# Altium PCB PCB 3210105209 谌梓轩.PcbDoc
Units mil, origin at the board's own origin, x right, y up, seen from the top; angles counter-clockwise.
Board outline 3937.01 x 1968.5 mil, 2 copper layers (Top Layer, Bottom Layer); 93 components, 82 nets, 314 pads, 119 vias.
Unrouted connection lines stored in the file: 3.
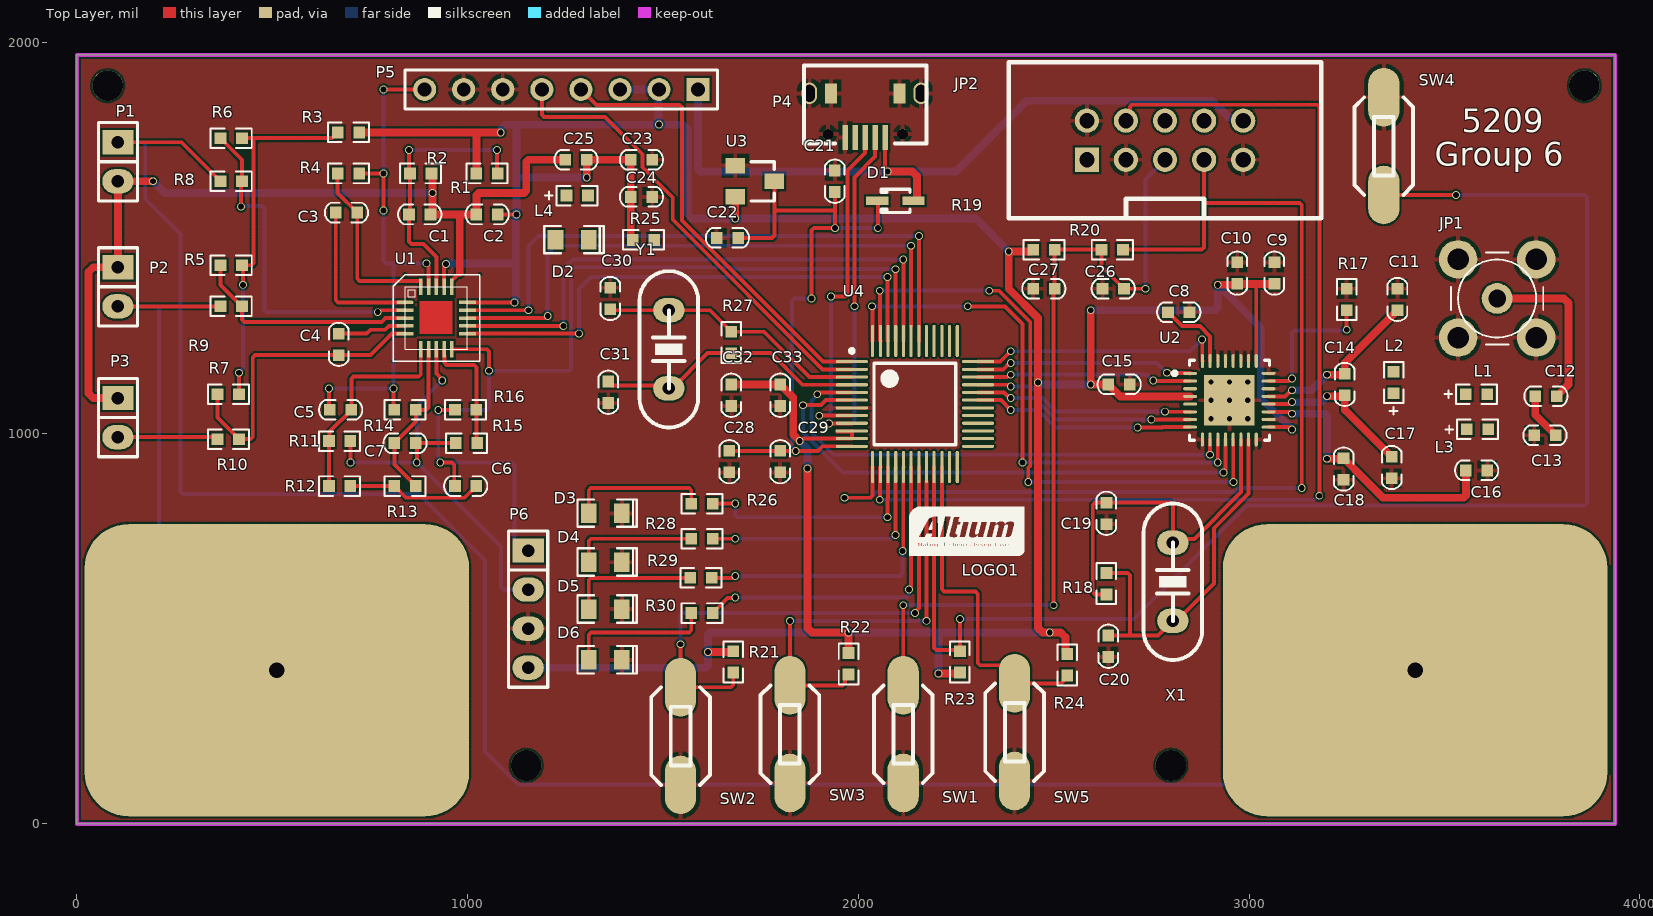
[diagram p0: Top Layer view]
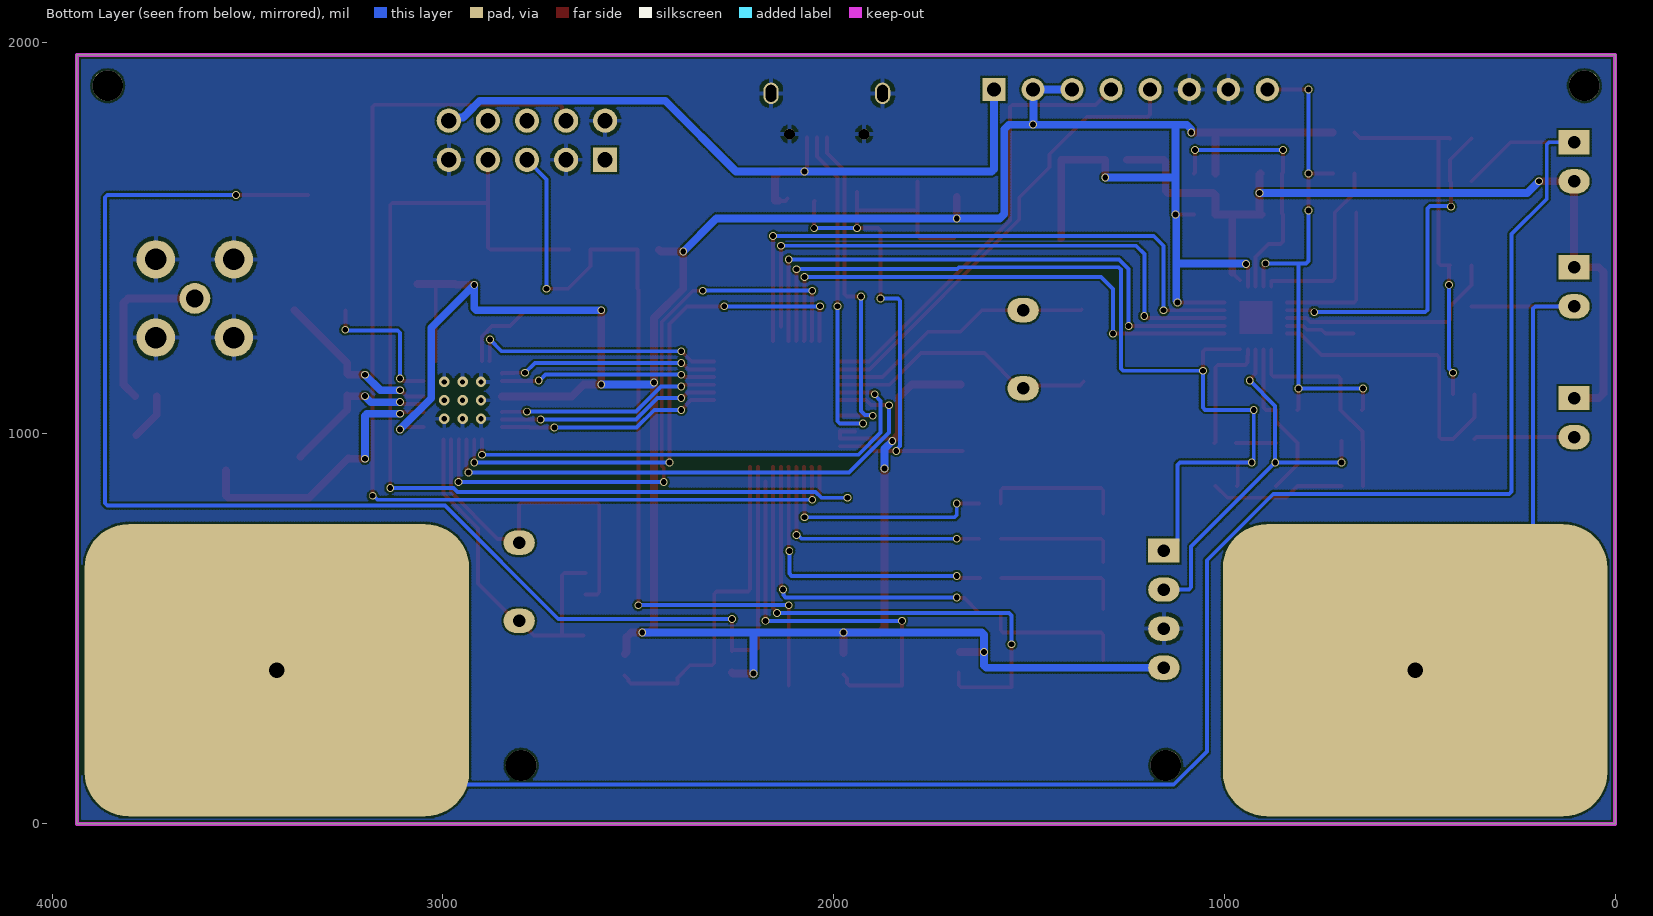
[diagram p1: Bottom Layer view, seen from below]
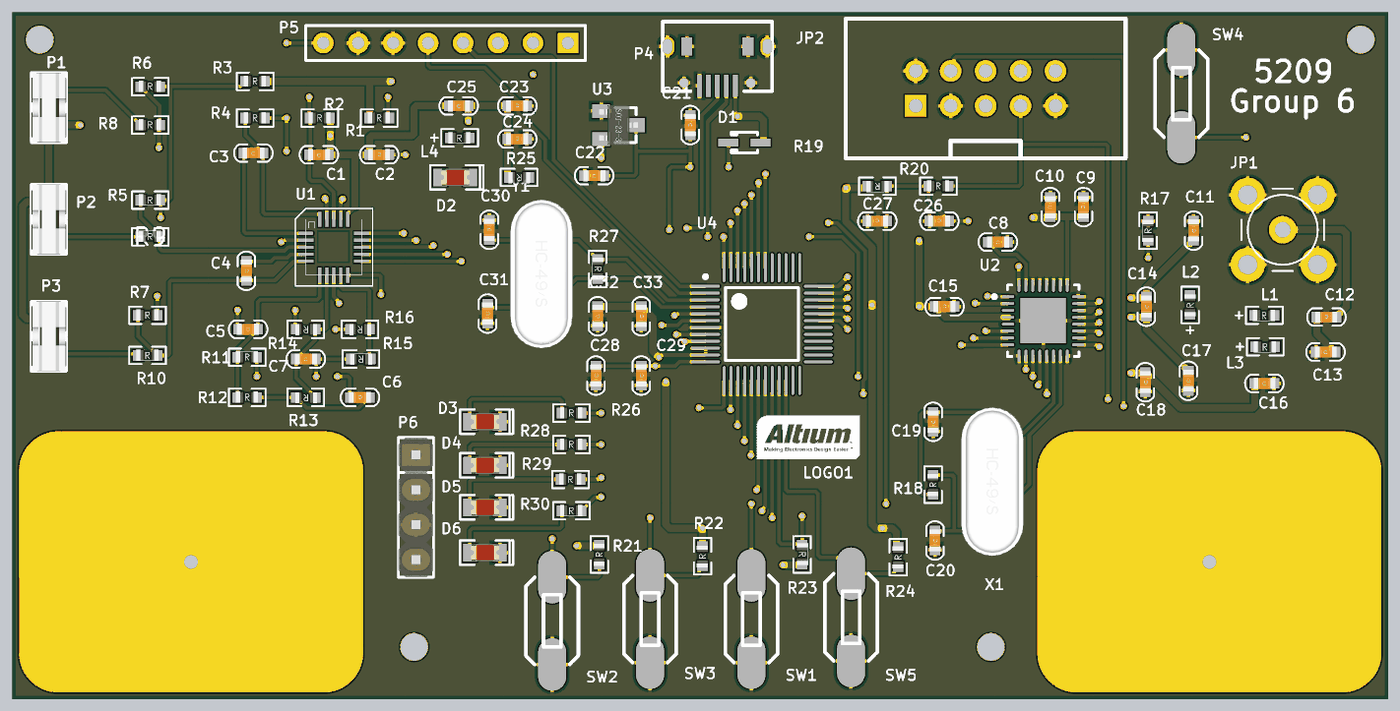
[diagram p2: 3D render of the assembled board from above, using the file's embedded part models]

## Layer stack, top to bottom
Top Solder: solder mask 0.4, Solder Resist, Dk 3.5
Top Layer: signal copper 1.4
Dielectric 1: dielectric 12.6, FR-4, Dk 4.8
Bottom Layer: signal copper 1.4
Bottom Solder: solder mask 0.4, Solder Resist, Dk 3.5

## Board outline
0,0 0,1968.5 3937.01,1968.5 3937.01,0

## Design rules (kind name [scope] priority, off if disabled: settings)
Clearance [All] p1: gap=5 ignorepadtopadclearanceinfootprint=FALSE
PolygonConnect [All] p1: connectstyle=Relief reliefconductorwidth=10 reliefentries=4 polygonreliefangle="90 Angle" airgapwidth=10
RoutingVias [All] p1: holewidth=28 width=50 viastyle="Through Hole" minholewidth=28 minwidth=50 maxholewidth=28 maxwidth=50
SolderMaskExpansion [All] p1: expansion=4 istentingtop=FALSE
Width [All] p1: maxlimit=25 minlimit=10 preferedwidth=10
30 further rules are at their usual default settings.

## Classes and differential pairs
component class "Part3 3210105209 谌梓轩": C8 C9 C10 C11 C12 C13 C14 C15 C16 C17 C18 C19 C20 JP1 L1 L2 L3 R17 R18 U2 X1
component class "Part2 3210105209 谌梓轩": C21 C22 C23 C24 C25 C26 C27 C28 C29 C30 C31 C32 C33 D1 D2 D3 D4 D5 D6 JP2 L4 P4 P5 P6 R19 R20 R21 R22 R23 R24 R25 R26 R27 R28 R29 R30 SW1 SW2 SW3 SW4 SW5 U3 U4 Y1
component class "Part1 3210105209 谌梓轩": C1 C2 C3 C4 C5 C6 C7 LOGO1 P1 P2 P3 R1 R2 R3 R4 R5 R6 R7 R8 R9 R10 R11 R12 R13 R14 R15 R16 U1

## Components (designator, comment, footprint, x,y, rotation, side; value= is the part's Value field where it differs from the comment)
C1 "0.1uF" 0603C 877.5,1560 r0 top value=75nF
C2 "0.1uF" 0603C 1050,1560 r180 top value=75nF
C3 "0.22uF" 0603C 690,1565 r0 top value=75nF
C4 "1nF" 0603C 670,1227.5 r90 top value=75nF
C5 "0.22uF/NC" 0603C 675,1060 r180 top value=75nF
C6 "3.3nF/NC" 0603C 995,865 r180 top value=75nF
C7 "22nF/NC" 0603C 840,975 r0 top value=75nF
C8 "10nF" 0603C 2820,1310 r0 top value=75nF
C9 "33PF" 0603C 3065,1410 r270 top value=75nF
C10 "4.7nF" 0603C 2970,1410 r270 top value=75nF
C11 "18PF" 0603C 3380,1342.5 r90 top value=75nF
C12 "6.8PF" 0603C 3760,1095 r180 top value=75nF
C13 "NC" 0603C 3757.5,995 r0 top value=75nF
C14 "NC" 0603C 3245,1125 r90 top value=75nF
C15 "33P" 0603C 2667.5,1125 r180 top value=75nF
C16 "180PF" 0603C 3582.5,905 r0 top value=75nF
C17 "18PF" 0603C 3365,912.5 r90 top value=75nF
C18 "33nF" 0603C 3242.07,908.5 r90 top value=75nF
C19 "15P" 0603C 2635,795 r90 top value=75nF
C20 "15P" 0603C 2640,455 r90 top value=75nF
C21 "106" 0603C 1940,1645 r270 top value=75nF
C22 "104" 0603C 1665,1500 r0 top value=75nF
C23 "106" 0603C 1445,1700 r180 top value=75nF
C24 "104" 0603C 1445,1605 r180 top value=75nF
C25 "106" 0603C 1277.5,1700 r0 top value=75nF
C26 "106" 0603C 2652.5,1370 r180 top value=75nF
C27 "104" 0603C 2475,1370 r180 top value=75nF
C28 "104" 0603C 1670,927.5 r90 top value=75nF
C29 "106" 0603C 1800,927.5 r90 top value=75nF
C30 "30pF" 0603C 1365,1345 r270 top value=75nF
C31 "30pF" 0603C 1360,1105 r90 top value=75nF
C32 "104" 0603C 1675,1097.5 r90 top value=75nF
C33 "106" 0603C 1800,1097.5 r90 top value=75nF
D1 "1N5819" SOD-323 2095,1595 r180 top
D2 "LED2" LED0805R 1225,1495 r0 top
D3 "LED0805R" LED0805R 1310,795 r0 top
D4 "LED0805R" LED0805R 1310,670 r0 top
D5 "LED0805R" LED0805R 1310,550 r0 top
D6 "LED0805R" LED0805R 1310,420 r0 top
JP1 "BNC" SMA 3635,1345 r180 top
JP2 "JTAG" IDC10L 2585,1700 r0 top
L1 "39nH" 0603-D 3582.5,1100 r0 top
L2 "12nH" 0603-D 3370,1130 r90 top
L3 "39nH" 0603-D 3585,1010 r0 top
L4 "100MHz600R" 0603-D 1280.45,1608.5 r0 top
LOGO1 "LOGO" LOGO 2285,750 r0 top
P1 "LA" SIP2 105,1745 r270 top
P2 "LA" SIP2 105,1425 r270 top
P3 "LA" SIP2 105,1090 r270 top
P4 "USB-mini" USB-Micro 2017.6,1767.05 r0 top
P5 "Header 8" HDR1X8 1590,1880 r180 top
P6 "Header 4" SIP4 1155,550 r270 top
R1 "10M" 0603R 1050,1665 r0 top value=16K
R2 "10M" 0603R 880,1665 r0 top value=16K
R3 "0/NC" 0603R 695,1770 r0 top value=16K
R4 "10M" 0603R 695,1665 r0 top value=16K
R5 "10M" 0603R 395,1430 r0 top value=16K
R6 "10M" 0603R 395,1755 r0 top value=16K
R7 "NC/0" 0603R 387.5,1100 r0 top value=16K
R8 "180K" 0603R 395,1645 r0 top value=16K
R9 "180K" 0603R 395,1325 r0 top value=16K
R10 "360K/NC" 0603R 387.5,985 r0 top value=16K
R11 "100K/NC" 0603R 672.5,980 r0 top value=16K
R12 "1M/NC" 0603R 672.5,865 r0 top value=16K
R13 "1M/NC" 0603R 840,865 r180 top value=16K
R14 "NC/0" 0603R 840,1060 r180 top value=16K
R15 "100K/NC" 0603R 997.5,975 r180 top value=16K
R16 "1M/0" 0603R 995,1060 r180 top value=16K
R17 "22K" 0603R 3250,1342.5 r90 top value=16K
R18 "10M" 0603R 2635,615 r90 top value=16K
R19 "1K" 0603R 2475,1470 r180 top value=16K
R20 "10K" 0603R 2650,1470 r0 top value=16K
R21 "10K" 0603R 1680,415 r90 top value=16K
R22 "10K" 0603R 1975,410 r90 top value=16K
R23 "10K" 0603R 2260,415 r270 top value=16K
R24 "10K" 0603R 2535,407.5 r90 top value=16K
R25 "10M" 0603R 1450,1495 r180 top value=16K
R26 "3.6K" 0603R 1600,820 r0 top value=16K
R27 "10M" 0603R 1675,1232.5 r270 top value=16K
R28 "3.6K" 0603R 1600,730 r0 top value=16K
R29 "3.6K" 0603R 1597.5,630 r0 top value=16K
R30 "3.6K" 0603R 1600,540 r0 top value=16K
SW1 "SW-PB" SW-BP-SMD 2115,230 r90 top
SW2 "SW-PB" SW-BP-SMD 1545,225 r90 top
SW3 "SW-PB" SW-BP-SMD 1825,230 r90 top
SW4 "SW-PB" SW-BP-SMD 3345,1735 r270 top
SW5 "SW-PB" SW-BP-SMD 2400,235 r90 top
U1 "AD8232" QFN-20 840,1335 r0 top
U2 "NRF905" QFN32_M 2949.61,1084.53 r0 top
U3 "XC6206" SOT-23-123 1735,1645 r90 top
U4 "C8051F340/1/4/5" TQFP48_M 2145,1075 r0 top
X1 "16M" CY2 2805,720 r270 top
Y1 "3.2768MHz" CY2 1515,1315 r270 top

## Footprints (in the part's own frame and the unit in brackets; to place one, negate y for a bottom-side part, rotate by r counter-clockwise, add the part's x,y. Pads: shape width x height; smd on the part's side, far side on the other; paste and mask are expansions set on the pad)
0603-D [mil]
  rect 30x30 smd: A(-27.5,0) K(27.5,0)
  silkscreen extent -82,-25 52,25, body extent -33,-16 30,16, height 21
0603C [mil]
  rect 30x30 smd: 1(-27.5,0) 2(27.5,0)
  silkscreen extent -55,-25 55,25, body extent -31,-16 32,16, height 35
0603R [mil]
  rect 30x30 smd: 1(-27.5,0) 2(27.5,0)
  silkscreen extent -52,-25 52,25, body extent -32,-15 30,17, height 21
CY2 [mil]
  oval 62x80 hole 32: 1(0,0) 2(200,0)
  silkscreen extent -100,-75 300,75, body extent -116,-89 309,88, height 138
HDR1X8 [mm] "Connector; Header; 8 Position"
  rect 1.5x1.5 hole 0.9: 1(0,0)
  round 1.5 hole 0.9: 2(2.54,0) 3(5.08,0) 4(7.62,0) 5(10.16,0) 6(12.7,0) 7(15.24,0) 8(17.78,0)
  silkscreen extent -1.27,-1.27 19.05,1.27
IDC10L [mil]
  rect 62x62 hole 39: 1(0,0)
  round 62 hole 39: 2(0,100) 3(100,0) 4(100,100) 5(200,0) 6(200,100) 7(300,0) 8(300,100) 9(400,0) 10(400,100)
  silkscreen extent -200,-150 600,250
LED0805R [mil]
  rect 40x50 smd: 1(0,0) 2(85,0)
  silkscreen extent -29,-35 123,35, body extent 3,-24 83,25, height 43
LOGO [mil]
  silkscreen extent -154,-62 140,62
QFN32_M [mm] "QFN, 32-Leads, Body 5x5mm, Pitch 0.5mm, IPC Low Density"
  oval 0.9x0.2 smd: 1(-2.55,1.75) 2(-2.55,1.25) 3(-2.55,0.75) 4(-2.55,0.25) 5(-2.55,-0.25) 6(-2.55,-0.75) 7(-2.55,-1.25) 8(-2.55,-1.75) 17(2.55,-1.75) 18(2.55,-1.25) 19(2.55,-0.75) 20(2.55,-0.25) 21(2.55,0.25) 22(2.55,0.75) 23(2.55,1.25) 24(2.55,1.75)
  oval 0.2x0.9 smd: 9(-1.75,-2.55) 10(-1.25,-2.55) 11(-0.75,-2.55) 12(-0.25,-2.55) 13(0.25,-2.55) 14(0.75,-2.55) 15(1.25,-2.55) 16(1.75,-2.55) 25(1.75,2.55) 26(1.25,2.55) 27(0.75,2.55) 28(0.25,2.55) 29(-0.25,2.55) 30(-0.75,2.55) 31(-1.25,2.55) 32(-1.75,2.55)
  rect 3.3x3.3 smd: 33(0,0)
  silkscreen extent -3.67,-2.6 2.6,2.6, body extent -2.58,-2.58 2.58,2.58, height 0.8
QFN-20 [mm]
  oval 1.1x0.23 smd: 1(0,0)
  rect 1.1x0.23 smd: 2(0,-0.508) 3(0,-1.016) 4(0,-1.524) 5(0,-2.032) 11(4.064,-2.032) 12(4.064,-1.524) 13(4.064,-1.016) 14(4.064,-0.508) 15(4.064,0)
  rect 0.23x1.1 smd: 6(1.016,-3.048) 7(1.524,-3.048) 8(2.032,-3.048) 9(2.54,-3.048) 10(3.048,-3.048) 16(3.048,1.016) 17(2.54,1.016) 18(2.032,1.016) 19(1.524,1.016) 20(1.016,1.016)
  Top Layer region: 0.926,0.104 0.926,-2.046 3.076,-2.046 3.076,0.104
  Top Layer lines w0.025: -0.762,-3.841 -0.741,-3.821 ; -0.014,1.792 -0.014,1.812 ; 4.85,1.802 4.861,1.812
  silkscreen extent -0.76,-3.84 4.86,1.81
SIP2 [mil]
  rect 62x80 hole 32: 1(0,0)
  oval 62x80 hole 32: 2(100,0)
  silkscreen extent -50,-50 150,50, body extent -50,-50 150,50, height 646
SIP4 [mil]
  rect 62x80 hole 32: 1(-150,0)
  oval 62x80 hole 32: 2(-50,0) 3(50,0) 4(150,0)
  silkscreen extent -200,-50 200,50, body extent -200,-50 200,50, height 118
SMA [mm] "Connector; RF Coaxial, MCX, Thru-Hole; 5 Position; Right-Angle"
  round 2 hole 1.143: 1(0,0)
  round 2.5 hole 1.397: 2(-2.54,2.54) 2(-2.54,-2.54) 2(2.54,2.54) 2(2.54,-2.54)
  silkscreen extent -3,-3 3,3
SOD-323 [mm] "SOD-323/SC-76; 2 Leads; Body 1.7 x 1.3 mm, (LxW)"
  rect 1.45x0.55 smd: 1(1.175,0) 2(-1.175,0)
  silkscreen extent -0.95,-0.75 0.95,0.75
SOT-23-123 [mil]
  rect 40x50 smd: 1(40,50) 2(-40,50) 3(0,-50)
  silkscreen extent -50,-50 50,10, body extent -57,-55 57,55, height 47
SW-BP-SMD [mil]
  oval 150x80 smd: 1(-125,0) 2(125,0)
  silkscreen extent -125,-75 125,75
TQFP48_M [mm] "48-Pin Thin Quad Flat Pack 0.5 mm Pitch, IPC Low Density"
  oval 2.1x0.2 smd: 1(-4.1,2.75) 2(-4.1,2.25) 3(-4.1,1.75) 4(-4.1,1.25) 5(-4.1,0.75) 6(-4.1,0.25) 7(-4.1,-0.25) 8(-4.1,-0.75) 9(-4.1,-1.25) 10(-4.1,-1.75) 11(-4.1,-2.25) 12(-4.1,-2.75) 25(4.1,-2.75) 26(4.1,-2.25) 27(4.1,-1.75) 28(4.1,-1.25) 29(4.1,-0.75) 30(4.1,-0.25) 31(4.1,0.25) 32(4.1,0.75) 33(4.1,1.25) 34(4.1,1.75) 35(4.1,2.25) 36(4.1,2.75)
  oval 0.2x2.1 smd: 13(-2.75,-4.1) 14(-2.25,-4.1) 15(-1.75,-4.1) 16(-1.25,-4.1) 17(-0.75,-4.1) 18(-0.25,-4.1) 19(0.25,-4.1) 20(0.75,-4.1) 21(1.25,-4.1) 22(1.75,-4.1) 23(2.25,-4.1) 24(2.75,-4.1) 37(2.75,4.1) 38(2.25,4.1) 39(1.75,4.1) 40(1.25,4.1) 41(0.75,4.1) 42(0.25,4.1) 43(-0.25,4.1) 44(-0.75,4.1) 45(-1.25,4.1) 46(-1.75,4.1) 47(-2.25,4.1) 48(-2.75,4.1)
  silkscreen extent -4.22,-2.65 2.65,3.57, body extent -3.5,-3.5 3.5,3.5, height 1.6
USB-Micro [mm]
  oval 1x1.4 hole 0.7 slot 1.1 at 90 deg: 0(-3.625,2.615) 0(3.625,2.615)
  round 0.7 hole 0.7: 0(-2.425,-0.035) 0(2.425,-0.035)
  rect 0.8x1.3 smd: 0(-2.225,2.615) 0(2.225,2.615)
  rect 0.35x1.6 smd: 1(1.3,-0.254) 2(0.65,-0.254) 3(0,-0.254) 4(-0.65,-0.254) 5(-1.3,-0.254)
  silkscreen extent -3.98,-0.64 3.98,4.43

## Part data
C1 C2 C3 C4 C5 C6 C7 C8 C9 C10 C11 C12 C13 C14 C15 C16 C17 C18 C19 C20 C21 C22 C23 C24 C25 C26 C27 C28 C29 C30 C31 C32 C33: library part Cap, "Capacitor", LatestRevisionDate=17-Jul-2002, LatestRevisionNote="Re-released for DXP Platform.", PackageDescription="Radial Cap, Thru-Hole; 2 Leads; 0.3 in Pin Spacing", PackageReference=RAD-0.3, Published=8-Jun-2000, Publisher="Altium Limited"
D1: library part DIODE
D2: "Typical RED, GREEN, YELLOW, AMBER GaAs LED", LatestRevisionDate=17-Jul-2002, LatestRevisionNote="Re-released for DXP Platform.", PackageReference=3.2X1.6X1.1, PackageVersion=Feb-2002, Published=8-Jun-2000, Publisher="Altium Limited"
D3 D4 D5 D6: library part LED0, "Typical INFRARED GaAs LED", LatestRevisionDate=08-Jul-2005, LatestRevisionNote="Mech Layer 1 removed.", PackageDescription="LED; 2 Leads", PackageReference=LED-0, Published=8-Jun-2000, Publisher="Altium Limited"
JP2: library part "Header 5X2", "Header, 5-Pin, Dual row", LatestRevisionDate=17-Jul-2002, LatestRevisionNote="Re-released for DXP Platform.", Publisher="Altium Limited"
L1 L2 L3 L4: library part INDUCTOR
P1 P2 P3: library part "Header 2", "Header, 2-Pin", LatestRevisionDate=17-Jul-2002, LatestRevisionNote="Re-released for DXP Platform.", Publisher="Altium Limited"
P5: "Header, 8-Pin", LatestRevisionDate=17-Jul-2002, LatestRevisionNote="Re-released for DXP Platform.", Publisher="Altium Limited"
P6: "Header, 4-Pin", LatestRevisionDate=17-Jul-2002, LatestRevisionNote="Re-released for DXP Platform.", Publisher="Altium Limited"
R1 R2 R3 R4 R5 R6 R7 R8 R9 R10 R11 R12 R13 R14 R15 R16 R17 R18 R19 R20 R21 R22 R23 R24 R25 R26 R27 R28 R29 R30: library part Res2, "Resistor", LatestRevisionDate=17-Jul-2002, LatestRevisionNote="Re-released for DXP Platform.", PackageDescription="Axial Device, Thru-Hole; 2 Leads; 0.4 in Pin Spacing", PackageReference=AXIAL-0.4, Published=8-Jun-2000, Publisher="Altium Limited"
U2: library part Component_1_1
X1 Y1: library part CRYSTAL

## Free pads (board coordinates)
  rrect30% 984.25x748.03 hole 39.37: 6(511.81,393.7) 7(3425.2,393.7)
  round 78.74 hole 78.74: 8(78.74,1889.76) 8(1150,150) 8(2800,150) 9(3858.27,1889.76)

## Via types
v1: diameter 20, hole 15, Top Layer to Bottom Layer, 110 vias
v2: diameter 25.98, hole 12.99, Top Layer to Bottom Layer, 9 vias

## Nets (pads, with @x,y where several pads share a name; then routed paths per layer and width w, separated by ;. In a path a pad name is that pad's centre, name@x,y a point inside that pad or via, vN(x,y) a via of type N, cw(c..) or ccw(c..) an arc to the next point about the centre after c; other vN are vias at no path point)
+3.3V: C2.1 C9.2 C10.2 C15.2 C23.2 C24.2 C25.2 C32.2 C33.2 P5.2 P5.3 P6.4 R1.1 R3.2 R19.2 R21.2 R22.2 R23.2 R24.2 R25.2 U1.15 U1.17 U2.4 U2.17 U2.25 U3.2 U4.10 U4.11 | length 9494.6
  Top Layer w10: U1.17 940,1425.58 945,1430.58 v1(945,1433.28) ; U1.15 v1(1120,1335) ; C2.1 v1(1125,1560) ; R25.2@1417.5,1500 R25.2 ; R21.2@1677.5,440 R21.2 ; v1(1850,980) 1852.71,980 1859.12,986.42 U4.11 U4.10 1982.52,1005.04 1945.12,1005.04 U4.10@1945.08,1005 ; C10.2@2967.5,1380 C10.2 ; 3017.5,1382.5 3018.5,1381.5 U2.25 ; U2.17 3101.66,1015.63 3107.29,1010 v1(3110,1010)
  Top Layer w20: R3.2 1022.66,1770 ; R1.1@1022.66,1665.16 1022.66,1770 ; v1(1085,1770) 1022.66,1770 ; v1(1305,1655) C25.2 C23.2 C24.2 R25.2@1417.5,1500 ; v1(1615,440) R21.2@1677.5,440 ; C32.2 C33.2 1833.28,1091.72 1833.28,996.72 v1(1850,980) ; v1(1685,1550) U3.2 ; v1(1870,910) 1870,501.72 1881.72,490 v1(1975,490) R22.2 ; v1(2205,385) 2257.5,385 R23.2 ; R19.2 2442.5,1465 v1(2385,1465) 2385,1370 2460,1295 v1(2460,1130) 2460,501.72 2471.72,490 2518.28,490 2530,478.28 2530,440 R24.2 ; v1(2595,1315) v1(2595,1125) C15.2 2670.63,1094.37 U2.4 ; v1(2920,1380) C10.2@2967.5,1380 ; C10.2 3017.5,1382.5 C9.2
  Bottom Layer w20: v1@945,1434.75 1123.28,1434.75 ; v1(1085,1770) 1085,1778.03 1096.72,1789.75 1125,1789.75 ; v1@1120,1336.46 1123.28,1339.75 1123.28,1434.75 ; 1125.42,1654.75 v1@1304.75,1654.75 ; P6.4 1609.14,400 1615,405.86 1615,484.14 1620.86,490 v1(1975,490) 2199.14,490 ; P5.3@1390.25,1879.75 P5.2@1489.75,1879.75 ; P5.2 1488.28,1878.28 1488.28,1791.72 v1(1490,1790) 1489.75,1789.75 1125,1789.75 ; v1@1490.25,1789.75 1551.57,1789.75 1563.28,1778.03 1563.28,1561.46 1575,1549.75 v1@1684.75,1549.75 ; v1(1685,1550) 2300,1550 v1(2385,1465) ; v1(1850,980) 1850.36,980 1870,960.36 v1(1870,910) ; v1(2205,385) 2205,484.14 2199.14,490 ; v1(2460,1130) 2465,1125 v1(2595,1125) ; v1(2490,490) 2199.14,490 ; v1(2595,1315) 2914.14,1315 2920,1320.86 v1(2920,1380) 3030,1270 3030,1090 v1(3110,1010) ; 1123.28,1434.75 1123.28,1558.28 v1(1125,1560) 1125,1789.75
+5V: D1.2 JP2.10 P4.1 P5.1 | length 1964.9
  Top Layer w10: P4.1 2068.78,1678.93 2075,1672.71 v1(2075,1670) ; D1.2@2117.72,1600.83 2123.54,1595 D1.2
  Top Layer w20: v1(2075,1670) 2138.28,1670 2150,1658.28 2150,1595.83 2149.17,1595 D1.2
  Bottom Layer w20: P5.1 1590,1675.86 1595.86,1670 v1(2075,1670) 2250,1670 2431,1851 2906.12,1851 2936,1821.12 2936,1820.7 2948.66,1808.04 2976.96,1808.04 JP2.10
AGND: C1.2 C2.2 C25.1 P1.2 P2.1 P3.1 R2.2 U1.16 | length 2325.9
  Top Layer w10: C1.2 970,1560 ; U1.16@960.47,1391.65 970,1401.18 980,1411.18
  Top Layer w20: P3.1 41.72,1090 30,1101.72 30,1413.28 41.72,1425 P2.1 P1.2 v1(195,1645) ; C1.2 915,1560 970,1560 C2.2 1022.5,1609.14 1028.36,1615 1144.14,1615 1150,1620.86 1150,1694.14 1155.86,1700 C25.1 ; R2.2 910,1662.5 v1(910,1615) C1.2@910,1565 ; 980,1411.18 980,1560
  Bottom Layer w20: v1(195,1645) 225,1615 v1(910,1615)
C2CK: JP2.7 R20.2 U4.13 | length 2737.5
  Top Layer w10: v1(1965,835) 2030.87,835 2036.73,840.86 U4.13 ; R20.2 2879.14,1470 2885,1475.86 2885,1589.67 ; JP2.7 2885,1589.67 ; v1(3135,860) 3135,1583.81 3129.14,1589.67 2885,1589.67
  Bottom Layer w10: v1(1965,835) 2031.72,835 2046.72,850 2963.28,850 2973.28,860 v1(3135,860)
C2D: JP2.4 U4.14 | length 2737.6
  Top Layer w10: v1(2055,830) 2055.71,830.71 2055.71,912.87 U4.14 ; JP2.4 2694.91,1809.91 2694.91,1835.14 2700.77,1841 3174.14,1841 3180,1835.14 v1(3180,840)
  Bottom Layer w10: v1(2055,830) 3167.29,830 3177.29,840 v1(3180,840)
D+: P4.3 U4.8 | length 876.2
  Top Layer w10: v1(1900,1045) 1900.24,1045.24 1983.35,1045.24 U4.8 ; v1(1930,1350) 1966.4,1350 1972.26,1355.86 1972.26,1672.26 2017.52,1717.52 2017.52,1756.97 P4.3
  Bottom Layer w10: v1(1900,1045) 1901.91,1046.91 1919.49,1046.91 1930,1057.43 v1(1930,1350)
D-: P4.2 U4.9 | length 875
  Top Layer w10: v1(1924.8,1025) 1925.19,1025.39 1983.19,1025.39 U4.9 ; v1(1990,1325) 1990,1655 2043.19,1708.19 P4.2
  Bottom Layer w10: v1(1924.8,1025) 1984.14,1025 1990,1030.86 v1(1990,1325)
GND: C8.2 C9.1 C10.1 C11.2 C13.1 C15.1 C16.2 C17.1 C18.1 C19.1 C20.1 C21.1 C22.1 C23.1 C24.1 C26.2 C27.2 C28.1 C29.1 C30.1 C31.1 C32.1 C33.1 D3.2 D4.2 D5.2 D6.2 JP1.2 JP2.2 JP2.3 JP2.9 P4.0 P4.5 P5.6 P5.7 P6.3 R17.2 SW1.1 SW2.1 SW3.1 SW4.1 SW5.1 U2.5 U2.9 U2.16 U2.18 U2.22 U2.24 U2.26 U2.27 U2.28 U2.29 U2.30 U2.33 U3.1 U4.7
  other v2: 2902.36,1037.28 2949.61,1037.28 2996.85,1037.28 2902.36,1084.53 2949.61,1084.53 2996.85,1084.53 2902.36,1131.77 2949.61,1131.77 2996.85,1131.77
LA: P1.1 pad.7 R8.1 | length 5181.2
  Top Layer w10: P1.1 267.5,1745 R8.1
  Bottom Layer w10: P1.1 169.14,1745 175,1739.14 175,1600 265,1510 265,850.86 270.86,845 875.07,845 1045,675.07 1045,185.18 1129.55,100.63 3132.13,100.63 pad.7
LA_OUT: C5.2 P5.8 R4.2 R14.2 U1.19 | length 1378.2
  Top Layer w10: v1(645,1115) 645,1062.5 C5.2 ; R4.2 v1(785,1665) v1(785,1570) ; v1(785,1880) P5.8 ; v1(810,1115) 810,1062.5 R14.2 ; v1(895,1435) 895,1432.29 900,1427.29 U1.19
  Bottom Layer w10: v1(645,1115) v1(810,1115) 810,1435 ; v1(785,1570) 785,1440.86 790.86,1435 810,1435 ; v1(785,1665) v1(785,1880) ; v1(895,1435) 810,1435
MISO: U2.10 U4.5 | length 1277.7
  Top Layer w10: v1(1895,1100) 1897.71,1100 1902.23,1104.53 U4.5 ; v1(2900,945) 2900.2,945.2 2900.2,983.94 U2.10
  Bottom Layer w10: v1(1895,1100) 1895,1097.93 1880,1082.93 1880,1001.72 1936.72,945 v1(2900,945)
MOSI: U2.11 U4.48 | length 1407.1
  Top Layer w10: v1(2035,1325) 2035.87,1324.13 2035.87,1237.28 U4.48 ; v1(2280,1325) 2375,1325 2420,1280 v1(2420,925) ; v1(2920,925) v1(2920,925) 2920.04,984.09 U2.11
  Bottom Layer w10: v1(2035,1325) v1(2280,1325) ; v1(2420,925) v1(2920,925)
NetC1_1: C1.1 R1.2 R2.1 U1.18 | length 685.2
  Top Layer w10: v1(850,1725) 850,1667.5 R2.1 852.5,1562.5 C1.1 850,1490.86 855.86,1485 886.72,1485 920,1451.72 U1.18 ; v1(1075,1725) 1075,1667.5 R1.2
  Bottom Layer w10: v1(850,1725) v1(1075,1725)
NetC3_1: C3.1 U1.1 | length 404.1
  Top Layer w10: C3.1 662.5,1340.86 668.36,1335 U1.1
NetC3_2: C3.2 R4.1 U1.20 | length 469.5
  Top Layer w10: R4.1 667.5,1615 C3.2 717.5,1395.89 723.36,1390.03 879.53,1390.03 880,1389.56 U1.20
NetC4_1: C4.1 R7.1 R10.2 U1.5 | length 793.7
  Top Layer w10: R7.1 360,1040 R10.2 444.14,985 450,990.86 450,1194.14 455.86,1200 C4.1 751.92,1200 806.92,1255 U1.5
NetC4_2: C4.2 U1.4 | length 178.3
  Top Layer w10: C4.2 741.67,1255 751.67,1265 788.64,1265 798.64,1275 U1.4
NetC6_1: C6.1 R12.2 R13.2 | length 347.4
  Top Layer w10: R12.2 R13.2 842.5,835 992.5,835 C6.1
NetC8_1: C8.1 U2.31 | length 196.6
  Top Layer w10: C8.1 2828.36,1274.14 2874.14,1274.14 2900.39,1247.89 U2.31
NetC11_1: C11.1 C14.2 U2.21 | length 437.5
  Top Layer w10: U2.21 3091.66,1094.37 3107.29,1110 v1(3110,1110)
  Top Layer w20: v1(3200,1150) 3242.5,1150 C14.2 3245,1180 C11.1
  Bottom Layer w20: v1(3110,1110) 3160,1110 v1(3200,1150)
NetC12_1: C12.1 JP1.1 | length 438.1
  Top Layer w20: JP1.1 3805.81,1345 3817.53,1333.28 3817.53,1125.03 C12.1
NetC12_2: C12.2 C13.2 | length 121.7
  Top Layer w20: C12.2 3732.5,1047.5 C13.2
NetC14_1: C14.1 C17.2 U2.20 | length 411.4
  Top Layer w10: U2.20 3101.98,1074.69 3107.29,1080 v1(3110,1080)
  Top Layer w20: v1(3200,1095) 3242.5,1095 C14.1 3245,1060 C17.2
  Bottom Layer w20: v1@3110.38,1079.62 3184.62,1079.62 v1(3200,1095)
NetC16_1: C16.1 C18.2 U2.19 | length 727.5
  Top Layer w10: U2.19 3102.29,1055 3107.29,1050 v1(3110,1050)
  Top Layer w20: v1(3200,935) 3241.06,935 C18.2 3297.61,880.47 3343.07,835 3549.14,835 3555,840.86 C16.1
  Bottom Layer w20: v1(3110,1050) 3194.14,1050 3200,1044.14 v1(3200,935)
NetC19_2: C19.2 R18.1 U2.14 X1.1 | length 930.5
  Top Layer w10: R18.1 2605.86,587.5 2600,593.36 2600,816.64 2605.86,822.5 2799.14,822.5 2805,816.64 X1.1 2814.95,729.95 2859.95,729.95 2980,850 2980,983.27 U2.14
NetC20_2: C20.2 R18.2 U2.15 X1.2 | length 946.8
  Top Layer w10: R18.2 2689.14,642.5 2695,636.64 2695,482.5 ; C20.2 2695,482.5 ; U2.15 2998.82,845.69 2910,756.87 2910,616 2814,520 X1.2 2767.5,482.5 2695,482.5
NetC26_1: C26.1 C27.1 JP2.5 R19.1 R20.1 SW1.2 | length 2150.6
  Top Layer w10: SW1.2 v1(2115,560) ; v1(2500,560) 2500,1367.5 C27.1 R19.1 R20.1 2622.5,1427.5 C26.1 v1(2735,1370)
  Bottom Layer w10: v1(2115,560) v1(2500,560) ; v1(2735,1370) 2735,1650 JP2.5
NetD2_1: R25.1
NetD3_1: D3.1 R26.1 | length 360.6
  Top Layer w10: D3.1 1310,854.14 1315.86,860 1566.64,860 1572.5,854.14 R26.1
NetD4_1: D4.1 R28.1 | length 319.1
  Top Layer w10: D4.1 1310,724.14 1315.86,730 R28.1
NetD5_1: D5.1 R29.1 | length 336.6
  Top Layer w10: D5.1 1310,624.14 1315.86,630 R29.1
NetD6_1: D6.1 R30.1 | length 375.6
  Top Layer w10: D6.1 1310,484.14 1315.86,490 1566.64,490 1572.5,495.86 R30.1
NetR3_1: R3.1 R5.2 R6.2 R7.2 | length 941.1
  Top Layer w10: R7.2 v1(415,1155) ; R6.2 423.36,1755.86 446.64,1755.86 452.5,1750 452.5,1435.86 446.64,1430 R5.2 425,1427.5 v1(425,1380) ; 446.84,1755.66 653.16,1755.66 R3.1
  Bottom Layer w10: v1(415,1155) 415,1155.86 425,1165.86 v1(425,1380)
NetR5_1: R5.1 R9.2 U1.3 | length 586
  Top Layer w10: R5.1 367.5,1380 R9.2 422.5,1290.86 428.36,1285 780.36,1285 790.36,1295 U1.3
NetR6_1: R6.1 R8.2 U1.2 | length 886.3
  Top Layer w10: R6.1 377.5,1745 422.5,1700 R8.2 420,1642.5 v1(420,1580) ; v1(770,1310) 772.71,1310 777.71,1315 U1.2
  Bottom Layer w10: v1(420,1580) 421.58,1581.58 474.14,1581.58 480,1575.72 480,1315.86 485.86,1310 v1(770,1310)
NetR17_1: R17.1 U2.23 | length 373
  Top Layer w10: U2.23 3101.03,1133.74 3107.29,1140 v1(3110,1140) ; v1(3250,1265) R17.1
  Bottom Layer w10: v1(3110,1140) 3110,1257.23 3115.86,1263.09 3248.09,1263.09 v1(3250,1265)
OPAMP+: C7.1 R13.1 R14.1 U1.7 | length 424.6
  Top Layer w10: R13.1 812.5,920 C7.1 867.5,1030 R14.1 894.14,1060 900,1065.86 U1.7
OPAMP-: R15.1 R16.1 U1.9 | length 316.4
  Top Layer w10: U1.9 940,1198.82 940.47,1198.35 940.47,1180.86 946.33,1175 1016.64,1175 1022.5,1169.14 R16.1 1022.5,977.5 R15.1
P0.7: U2.13 U4.47 | length 1593.7
  Top Layer w10: v1(2055,1365) 2055.71,1364.29 2055.71,1237.13 U4.47 ; v1(2335,1365) 2335.18,1364.82 2360.18,1364.82 2440,1285 2440,916.72 2435,911.72 v1(2435,875) ; U2.13 2959.72,983.86 2959.72,875.28 v1(2960,875)
  Bottom Layer w10: v1(2055,1365) v1(2335,1365) ; v1(2435,875) v1(2960,875)
P1.0: U1.11 U4.46 | length 1366
  Top Layer w10: U1.11 v1(1285,1255) ; v1(2075,1400) 2075,1274.92 2075.04,1274.88 2075.04,1237.48 U4.46
  Bottom Layer w10: v1(1285,1255) 1285,1369.14 1315.86,1400 v1(2075,1400)
P1.1: C6.2 P6.1 R16.2 U1.10 U4.45 | length 2561.3
  Top Layer w10: v1(925,1060) R16.2 ; v1(930,925) 960,925 965.86,919.14 965.86,866.64 C6.2 ; U1.10 1049.14,1215 1055,1209.14 v1(1055,1160) ; v1(2095,1420) 2095.39,1419.61 2095.39,1236.81 U4.45
  Bottom Layer w10: P6.1 1146,700 1120,726 1120,919.14 1114.14,925 v1(930,925) 930,927.71 925,932.71 v1(925,1060) 1049.14,1060 1055,1065.86 v1(1055,1160) 1259.14,1160 1265,1165.86 1265,1419.14 1270.86,1425 1679.08,1425 1684.08,1420 v1(2095,1420)
P1.2: U1.12 U4.44 | length 1479.3
  Top Layer w10: U1.12 v1(1245,1275) ; v1(2115,1445) 2115.24,1444.76 2115.24,1236.65 U4.44
  Bottom Layer w10: v1(1245,1275) 1245,1420.36 1269.64,1445 v1(2115,1445)
P1.3: U1.13 U4.43 | length 1512.2
  Top Layer w10: U1.13 1197.29,1295 1202.29,1300 v1(1205,1300) ; v1(2135,1480) 2135.16,1479.84 U4.43@2135.16,1272.76
  Bottom Layer w10: v1(1205,1300) 1205,1459.14 1225.86,1480 v1(2135,1480)
P1.4: U1.14 U4.42 | length 1599
  Top Layer w10: U1.14 v1(1155.87,1315) ; U4.42 2155,1236.57 v1(2155,1505)
  Bottom Layer w10: v1(1155.87,1315) 1155.87,1480.01 1180.86,1505 v1(2155,1505)
P1.5: U4.41
P1.6: U4.40
P1.7: U4.39
P2.0: U4.38
P2.1: U4.37
P2.2: U2.32 U4.36 | length 652.5
  Top Layer w10: U4.36 2363.27,1183.27 v1(2390,1210) ; v1(2880,1240) 2880.35,1239.65 2880.35,1185.28 U2.32
  Bottom Layer w10: v1(2390,1210) 2850,1210 v1(2880,1240)
P2.3: U2.1 U4.35 | length 560.6
  Top Layer w10: U4.35 2371.06,1163.58 2387.48,1180 v1(2390,1180) ; v1(2790,1155) 2815.3,1155 2816.5,1153.81 2848.83,1153.81 U2.1
  Bottom Layer w10: v1(2390,1180) 2765,1180 v1(2790,1155)
P2.4: U2.2 U4.34 | length 552.1
  Top Layer w10: U4.34 2381.19,1143.9 2387.29,1150 v1(2390,1150) ; v1(2755,1135) 2756.26,1133.74 U2.2
  Bottom Layer w10: v1(2390,1150) 2737.29,1150 2752.29,1135 v1(2755,1135)
P2.5: U2.6 U4.33 | length 571.5
  Top Layer w10: U4.33 2383.08,1124.21 2387.29,1120 v1(2390,1120) ; v1(2785,1055.32) 2785.16,1055.16 2849.06,1055.16 U2.6
  Bottom Layer w10: v1(2390,1120) 2441.72,1120 2506.4,1055.32 v1(2785,1055.32)
P2.6: U2.7 U4.32 | length 571.7
  Top Layer w10: U4.32 2372.77,1104.53 2387.29,1090 v1(2390,1090) ; v1(2750,1035) 2750.16,1035.16 2849.06,1035.16 U2.7
  Bottom Layer w10: v1(2390,1090) 2450.5,1090 2505.5,1035 v1(2750,1035)
P2.7: U2.8 U4.31 | length 572
  Top Layer w10: U4.31 2365.16,1084.84 v1(2390,1060) ; v1(2715,1015) 2777.74,1015 2778.37,1015.63 U2.8
  Bottom Layer w10: v1(2390,1060) 2459.29,1060 2504.29,1015 v1(2715,1015)
P3.0: U4.30
P3.1: U4.29
P3.2: U4.28
P3.3: U4.27
P3.4: U4.26
P3.5: U4.25
P3.6: U4.24
P3.7: U4.23
P4.0: R24.1 SW5.2 U4.22 | length 856.2
  Top Layer w10: U4.22 2213.9,600.86 2219.76,595 2299.78,595 2305.64,589.14 2305.64,412.25 2311.5,406.39 2367.66,406.39 2400,374.06 SW5.2 2519.14,360 2525,365.86 2525,370 R24.1
P4.1: R23.1 SW4.2 U4.21 | length 3647.7
  Top Layer w10: U4.21 2194.21,450.86 2200.07,445 2257.5,445 R23.1 v1(2260,525) ; SW4.2 v1(3530,1610)
  Bottom Layer w10: v1(2260,525) 2705,525 2995,815 3859.14,815 3865,820.86 3865,1604.14 3859.14,1610 v1(3530,1610)
P4.2: R22.1 SW3.2 U4.20 | length 1040
  Top Layer w10: v1(1825,520) SW3.2 1959.57,355 1965.43,360.86 1965.43,372.93 R22.1 ; v1(2174.21,520) 2174.37,520.16 U4.20@2174.37,877.24
  Bottom Layer w10: v1(1825,520) v1(2174.21,520)
P4.3: R21.1 SW2.2 U4.19 | length 1333.4
  Top Layer w10: v1(1545,460) SW2.2 1674.14,350 1680,355.86 R21.1 ; v1(2145,540) 2145,542.71 2154.92,552.63 2154.92,913.5 U4.19
  Bottom Layer w10: v1(1545,460) 1545,534.14 1550.86,540 v1(2145,540)
P4.4: R30.2 U4.18 | length 850.6
  Top Layer w10: R30.2 1665.59,578.09 1683.09,578.09 v1(1685,580) ; v1(2130,600) 2130,602.71 2135.16,607.86 U4.18
  Bottom Layer w10: v1(1685,580) 2122.93,580 2128.79,585.86 2128.79,598.79 v1(2130,600)
P4.5: R29.2 U4.17 | length 766.6
  Top Layer w10: R29.2 1677.29,630 1682.29,635 v1(1685,635) ; v1(2113.57,698.79) 2115,700.22 2115,913.11 U4.17
  Bottom Layer w10: v1(1685,635) 2107.71,635 2113.57,640.86 v1(2113.57,698.79)
P4.6: R28.2 U4.16 | length 645.6
  Top Layer w10: R28.2 v1(1685,730) ; v1(2095,740) 2095.39,740.39 2095.39,913.19 U4.16
  Bottom Layer w10: v1(1685,730) 2082.29,730 2092.29,740 v1(2095,740)
P4.7: R26.2 U4.15 | length 608.1
  Top Layer w10: R26.2 v1(1685,820) ; v1(2075,785) 2075,833.41 2076.1,834.51 U4.15
  Bottom Layer w10: v1(1685,820) 1685,790.86 1690.86,785 v1(2075,785)
RA: P2.2 pad.6 R9.1 | length 1420.4
  Top Layer w10: P2.2 R9.1
  Bottom Layer w10: P2.2 204.14,1325 210,1319.14 210,695.51 pad.6
RL: P3.2 R10.1 | length 257.1
  Top Layer w10: P3.2 355,990 R10.1
RX0: P5.4 U4.1 | length 1151.5
  Top Layer w10: P5.4@1290.43,1879.57 1317.46,1852.54 1329.53,1840.47 1542.95,1840.47 1548.81,1834.61 1548.81,1544.55 1910.09,1183.27 U4.1
SCK: U2.12 U4.6 | length 1405.6
  Top Layer w10: v1(1858.36,1071.91) 1904.62,1071.91 1917.55,1084.84 U4.6 ; v1(2935,900) 2935,902.71 2940,907.71 2940,943.95 2939.76,944.18 U2.12
  Bottom Layer w10: v1(1858.36,1071.91) 1858.36,1002.14 1960.5,900 v1(2935,900)
SW: C5.1 R11.1 R12.1 U1.6 | length 544.5
  Top Layer w10: R12.1 R11.1 646.64,981.64 646.64,1004.14 C5.1 702.5,1139.14 708.36,1145 874.14,1145 880,1150.86 U1.6
TX0: P5.5 U4.2 | length 1180.3
  Top Layer w10: P5.5 1190,1815.86 1195.86,1810 1351.64,1810 1447.5,1714.14 1447.5,1680.86 1525,1603.36 1525,1547.14 1908.56,1163.58 U4.2
UPCLK: U2.3
VBUS: C21.2 C22.2 C28.2 C29.2 D1.1 U3.3 U4.12 | length 1657.8
  Top Layer w10: C28.2 1896.65,955 1908.38,966.73 U4.12 ; C22.2 1779.14,1500 1785,1505.86 1785,1570 ; U3.3 1785,1570 ; v1(1880,1345) 1880,1519.14 1885.86,1525 v1(1940,1525) 1940,1570 ; C21.2 1940,1570 ; D1.1 2050,1593.74 v1(2050,1525) ; 1785,1570 1940,1570
  Bottom Layer w10: v1(1840,955) 1840,957.71 1835,962.71 1835,962.92 1830,967.92 1830,1339.14 1835.86,1345 v1(1880,1345) ; v1(1940,1525) v1(2050,1525)
VREFOUT: C7.2 P6.2 R11.2 R15.2 U1.8 | length 1182.3
  Top Layer w10: v1(700,925) R11.2 ; v1(870,925) 870,972.5 C7.2 R15.2 ; U1.8 920,1152.71 935,1137.71 v1(935,1135)
  Bottom Layer w10: v1(700,925) v1(870,925) ; v1(935,1135) 870,1070 v1(870,925) ; P6.2 1090.86,600 1085,605.86 1085,710 v1(870,925)
XTAL1: C31.2 R27.2 U4.4 Y1.2 | length 701.6
  Top Layer w10: C31.2 1370,1122.5 1507.5,1122.5 Y1.2 1524,1115 1614,1205 R27.2 1776.26,1205 1857.05,1124.21 U4.4
XTAL2: C30.2 R27.1 U4.3 Y1.1 | length 690.5
  Top Layer w10: C30.2 1367.5,1315 Y1.1 1620,1315 R27.1 1758.6,1260 1874.7,1143.9 U4.3
pads on no net: D2.1 D2.2 JP2.1 JP2.6 JP2.8 L1.A L1.K L2.A L2.K L3.A L3.K L4.A L4.K P4.4

## Polygon pours and split planes (outlines as drawn)
GND on Bottom Layer "GND_L02_P-001" (hatched 90Degree grid 4 track 4, remove dead copper, pour order 0): 0,0 3940,0 3940,1970 3939.27,1970.73 -1.17,1970.73 -1.17,-3.83 0,-5
GND on Top Layer "GND_L02_P-001" (hatched 90Degree grid 4 track 4, remove dead copper, pour order 1): 0,0 3940,0 3940,1970 0,1970

## Keep-outs
Keep-Out Layer:
  the board outline again, w10

## Silkscreen, mask and mechanical layers (free items; w line width, h text height)
Top Overlay:
  text "5209" at 3545,1770 h60
  text "Group 6" at 3475,1684.99 h60